# Altium PCB PCB.PcbDoc
Units mm, origin at the board's own origin, x right, y up, seen from the top; angles counter-clockwise.
Board outline 15.5 x 8.4 mm, 2 copper layers (Top Layer, Bottom Layer), stack 0.98 mm thick; 2 components, 5 nets, 19 pads, 0 vias.
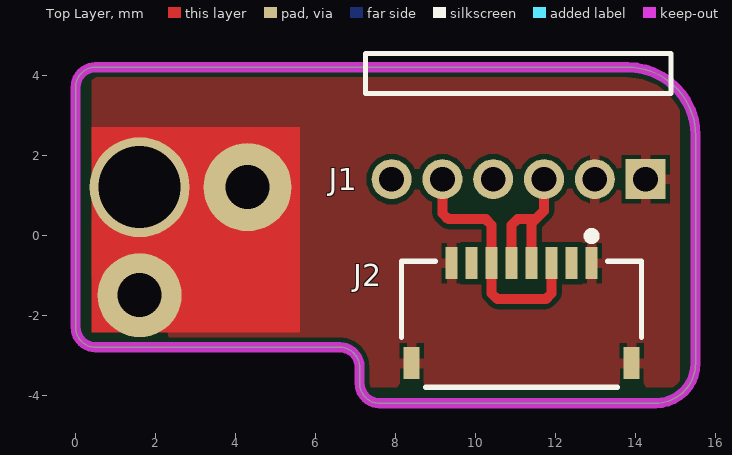
[diagram p0: Top Layer view]
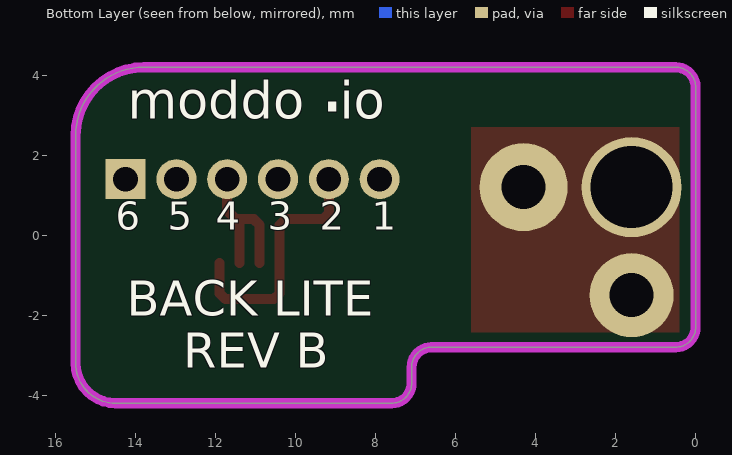
[diagram p1: Bottom Layer view, seen from below]

## Layer stack, top to bottom
Top Solder: solder mask 0.0102, Solder Resist, Dk 3.5
Top Layer: signal copper 0.0356
Dielectric 1: dielectric 0.9086, FR-4, Dk 4.8
Bottom Layer: signal copper 0.0356
Bottom Solder: solder mask 0.0102, Solder Resist, Dk 3.5

## Board outline
0.5,-2.8 cw(c0.5,-2.3) 0,-2.3 0,3.7 cw(c0.5,3.7) 0.5,4.2 13.793,4.2 cw(c13.793,2.492) 15.501,2.492 15.5,-3.2 cw(c14.5,-3.2) 14.5,-4.2 7.6,-4.2 cw(c7.6,-3.7) 7.1,-3.7 7.1,-3.3 ccw(c6.6,-3.3) 6.6,-2.8

## Design rules (kind name [scope] priority, off if disabled: settings)
BoardOutlineClearance [All] p1: gap=0.2 ignorepadtopadclearanceinfootprint=FALSE
Clearance GND_bot [InNamedPolygon('GND_bot')] p1: gap=0.2 ignorepadtopadclearanceinfootprint=FALSE
Clearance GND_top [InNamedPolygon('GND_top')] p2: gap=0.1 ignorepadtopadclearanceinfootprint=FALSE
Clearance [All] p3: gap=0.12 ignorepadtopadclearanceinfootprint=FALSE
HoleSize [All] p1: absolutevalues=TRUE maxlimit=10 minlimit=0.025 maxpercent=80.000 minpercent=20.000
MinimumSolderMaskSliver [All] p1: minsoldermaskwidth=0.05
PolygonConnect [All] p1: thpad.connectstyle=Relief thpad.reliefconductorwidth=0.254 thpad.reliefentries=4 thpad.polygonreliefangle="90 Angle" thpad.airgapwidth=0.1 smdpad.connectstyle=Relief smdpad.reliefconductorwidth=0.254 smdpad.reliefentries=4 smdpad.polygonreliefangle="90 Angle" smdpad.airgapwidth=0.1 via.connectstyle=Direct via.reliefconductorwidth=0.254 via.reliefentries=4 via.polygonreliefangle="90 Angle" via.airgapwidth=0.254
RoutingVias [All] p1: holewidth=0.3 width=0.4 viastyle="Through Hole" minholewidth=0.3 minwidth=0.4 maxholewidth=2 maxwidth=10
SilkToSilkClearance [All] p1: silktosilkclearance=0.01
SilkToSolderMaskClearance [IsPad] p1: minsilkscreentomaskgap=0.001 clearancetoexposedcopper=TRUE
SolderMaskExpansion [All] p1: expansion=0.05 istentingtop=FALSE
SupplyNets "Schematic Supply Nets" [InNet('VDD_EXP')] p1: voltage=0.000
SupplyNets "Schematic Supply Nets_2" [InNet('VBUS')] p2: voltage=0.000
SupplyNets "Schematic Supply Nets_1" [InNet('GND')] p3: voltage=0.000
UnRoutedNet [All] p1: checkbadconnections=TRUE
Width [All] p1: maxlimit=2.54 minlimit=0.089 preferedwidth=0.254
25 further rules are at their usual default settings.

## Components (designator, comment, footprint, x,y, rotation, side; value= is the part's Value field where it differs from the comment)
J1 "1.27mm_6pins" 1.27mm_6pins_MaleHeader_RightAngle 14.25,1.4 r180 top
J2 "2328702-8" 2328702-8 11.15,-4.05 r0 top

## Footprints (in the part's own frame and the unit in brackets; to place one, negate y for a bottom-side part, rotate by r counter-clockwise, add the part's x,y. Pads: shape width x height; smd on the part's side, far side on the other; paste and mask are expansions set on the pad)
1.27mm_6pins_MaleHeader_RightAngle [mm]
  rect 1x1 hole 0.62 mask+0.05: 1(0,0)
  round 1 hole 0.62 mask+0.05: 2(1.27,0) 3(2.54,0) 4(3.81,0) 5(5.08,0) 6(6.35,0)
  silkscreen extent -0.63,-3.14 7,-2.14, body extent -0.62,-7.4 7,0.25, height 2.02
2328702-8 [mm]
  rect 0.3x0.8 smd mask+0.05: 1(1.75,3.35) 2(1.25,3.35) 3(0.75,3.35) 4(0.25,3.35) 5(-0.25,3.35) 6(-0.75,3.35) 7(-1.25,3.35) 8(-1.75,3.35)
  rect 0.4x0.8 smd mask+0.05: S1(2.75,0.85) S2(-2.75,0.85)
  silkscreen extent -3,0.25 3,4.13, body extent -3,0.25 3,4.08, height 1.06

## Part data
J1: library part 1.27mm_6pins_male_rightangle
J2: "FFC/FPC Connector, 8 Contact(s), 1 Row(s), Right Angle, Solder Terminal, Natural Insulator", Actuator Color=Black, Flammability Rating="UL94 V-0", Housing Color=Natural, Manufacturer="TE Connectivity", Max Operating Temperature=85°C, Min Operating Temperature=-40°C, Operating Supply Voltage=50V, Actuator Material=Thermoplastic, Category="FFC / FPC", ComponentLink1Description=https://www.te.com/commerce/DocumentDelivery/DDEController?Action=srchrtrv&amp;DocNm=2328702&amp;DocType=Customer+Drawing&amp;DocLang=English&src-supplier=Digikey, ComponentLink1URL=https://www.te.com/commerce/DocumentDelivery/DDEController?Action=srchrtrv&amp;DocNm=2328702&amp;DocType=Customer+Drawing&amp;DocLang=English&src-supplier=Digikey, Connector System=Wire-to-Board, Contact Material="Copper Alloy", Contact Plating=Gold, Gender=Receptacle, Height=1mm, Housing Material=Thermoplastic, Length=6mm, Manufacturer Part Number=2328702-8, Mounting Technology="Surface Mount", Number of Contacts=8, Number of Positions=8, Number of Rows=1, Orientation="Right Angle", Packaging="Cut Tape", Plating=Gold, Pricing 1="28000=0.0961 (USD)", RoHS=Yes, Sealable="No (Without)", Series=-, Stock 1=56000, Supplier 1="Arrow Electronics", Supplier Part Number 1=2328702-8, Termination=Solder, Voltage Rating=50V

## Free pads (board coordinates)
  round 2.1 hole 1.1: ""(1.6,-1.5)
  round 2.5 hole 2.05: ""(1.6,1.2)
  round 2.2 hole 1.1: ""(4.3,1.2)

## Nets (pads, with @x,y where several pads share a name; then routed paths per layer and width w, separated by ;. In a path a pad name is that pad's centre, name@x,y a point inside that pad or via, vN(x,y) a via of type N, cw(c..) or ccw(c..) an arc to the next point about the centre after c; other vN are vias at no path point)
CLICK_BACKWARD: J1.5 J2.3 J2.6 | length 6.3
  Top Layer w0.25: J1.5 9.17,0.546 9.316,0.4 10.254,0.4 10.4,0.254 J2.6 10.4,-1.454 10.546,-1.6 11.754,-1.6 11.9,-1.454 J2.3
CLICK_FORWARD: J1.3 J2.4 J2.5 | length 3.8
  Top Layer w0.25: J2.5 10.9,0.254 11.046,0.4 11.5,0.4 ; J2.4 11.4,0.3 11.5,0.4 ; J1.3 11.71,0.61 11.5,0.4
GND: J1.1 J1.2 J2.1 J2.8 J2.S1 J2.S2 pad.
VBUS: J1.6
VDD_EXP: J1.4
pads on no net: J2.2 J2.7

## Polygon pours and split planes (outlines as drawn)
GND on Top Layer "GND_L01_P000" (solid, pour order 0): 0.4,-3.8 0.4,4.2 13.793,4.2 cw(c13.793,2.492) 15.1,3.591 15.1,-3.8

## Keep-outs
Keep-Out Layer:
  the board outline again, w0.254

## Other copper
Top Layer:
  rectangle net GND: 0.4,-2.43 5.612,2.7

## Silkscreen, mask and mechanical layers (free items; w line width, h text height)
Bottom Overlay:
  text "io" at 8.9,2.6 h1.6
  text "." at 9.4,2.6 h2.5
  text "moddo" at 14.2,2.6 h1.6
  text "1" at 8.1,-0.1 h1.2
  text "2" at 9.4,-0.1 h1.2
  text "3" at 10.7,-0.1 h1.2
  text "4" at 12,-0.1 h1.2
  text "5" at 13.2,-0.1 h1.2
  text "6" at 14.5,-0.1 h1.2
  text "BACK LITE" at 14.227,-2.3 h1.5
  text "REV B" at 12.814,-3.6 h1.5